# Altium PCB POVBase.PcbDoc (part 1 of 3)
Units mm, origin at the board's own origin, x right, y up, seen from the top; angles counter-clockwise.
Board outline 80 x 80 mm, 2 copper layers (Top Layer, Bottom Layer); 110 components, 82 nets, 474 pads, 224 vias.
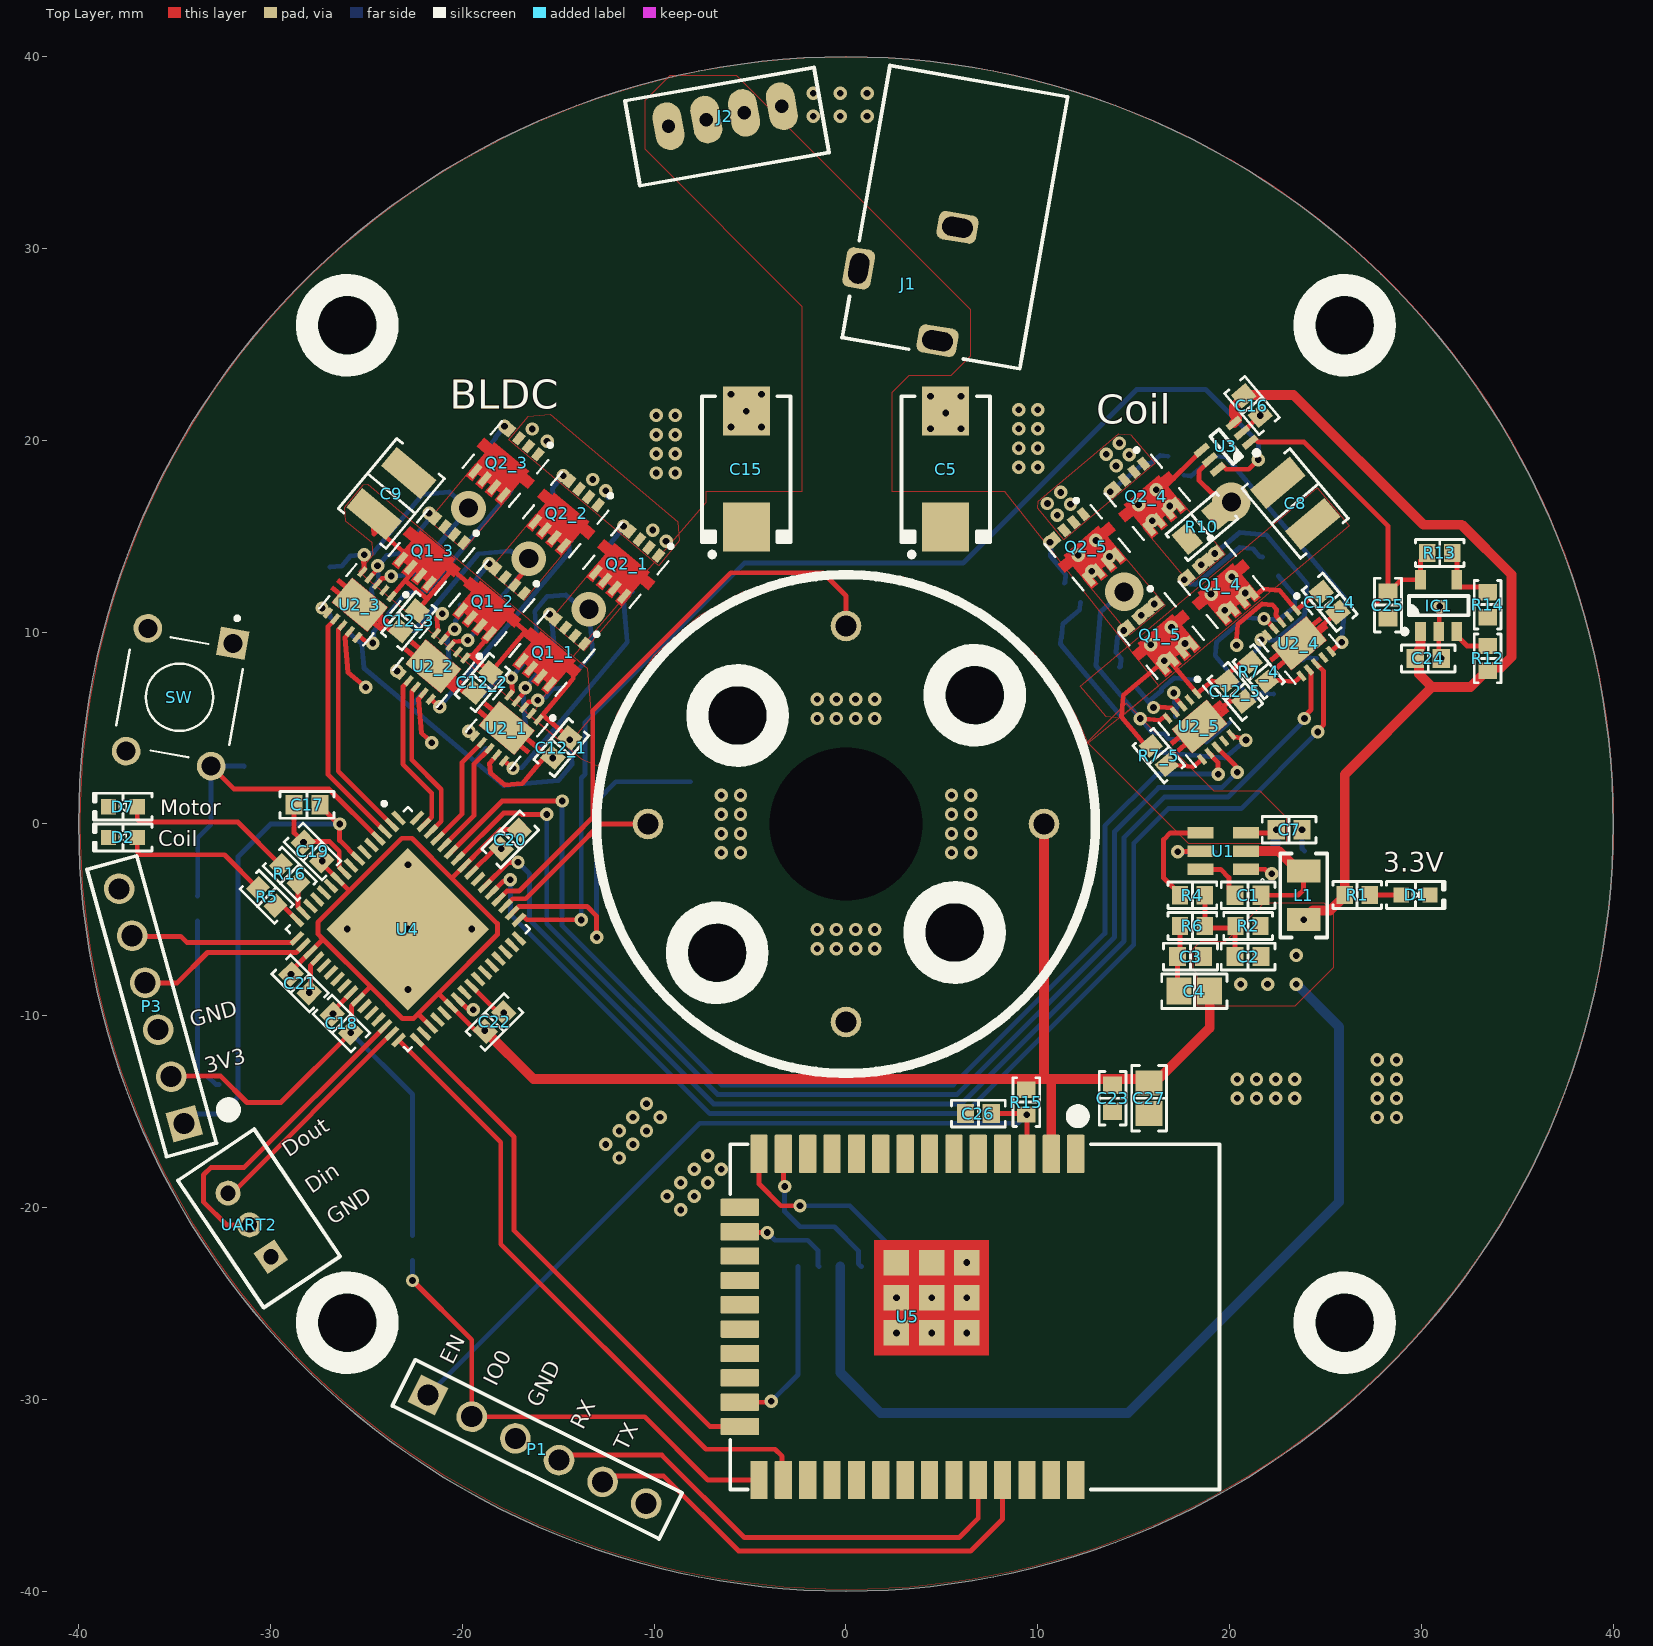
[diagram p0: Top Layer view]
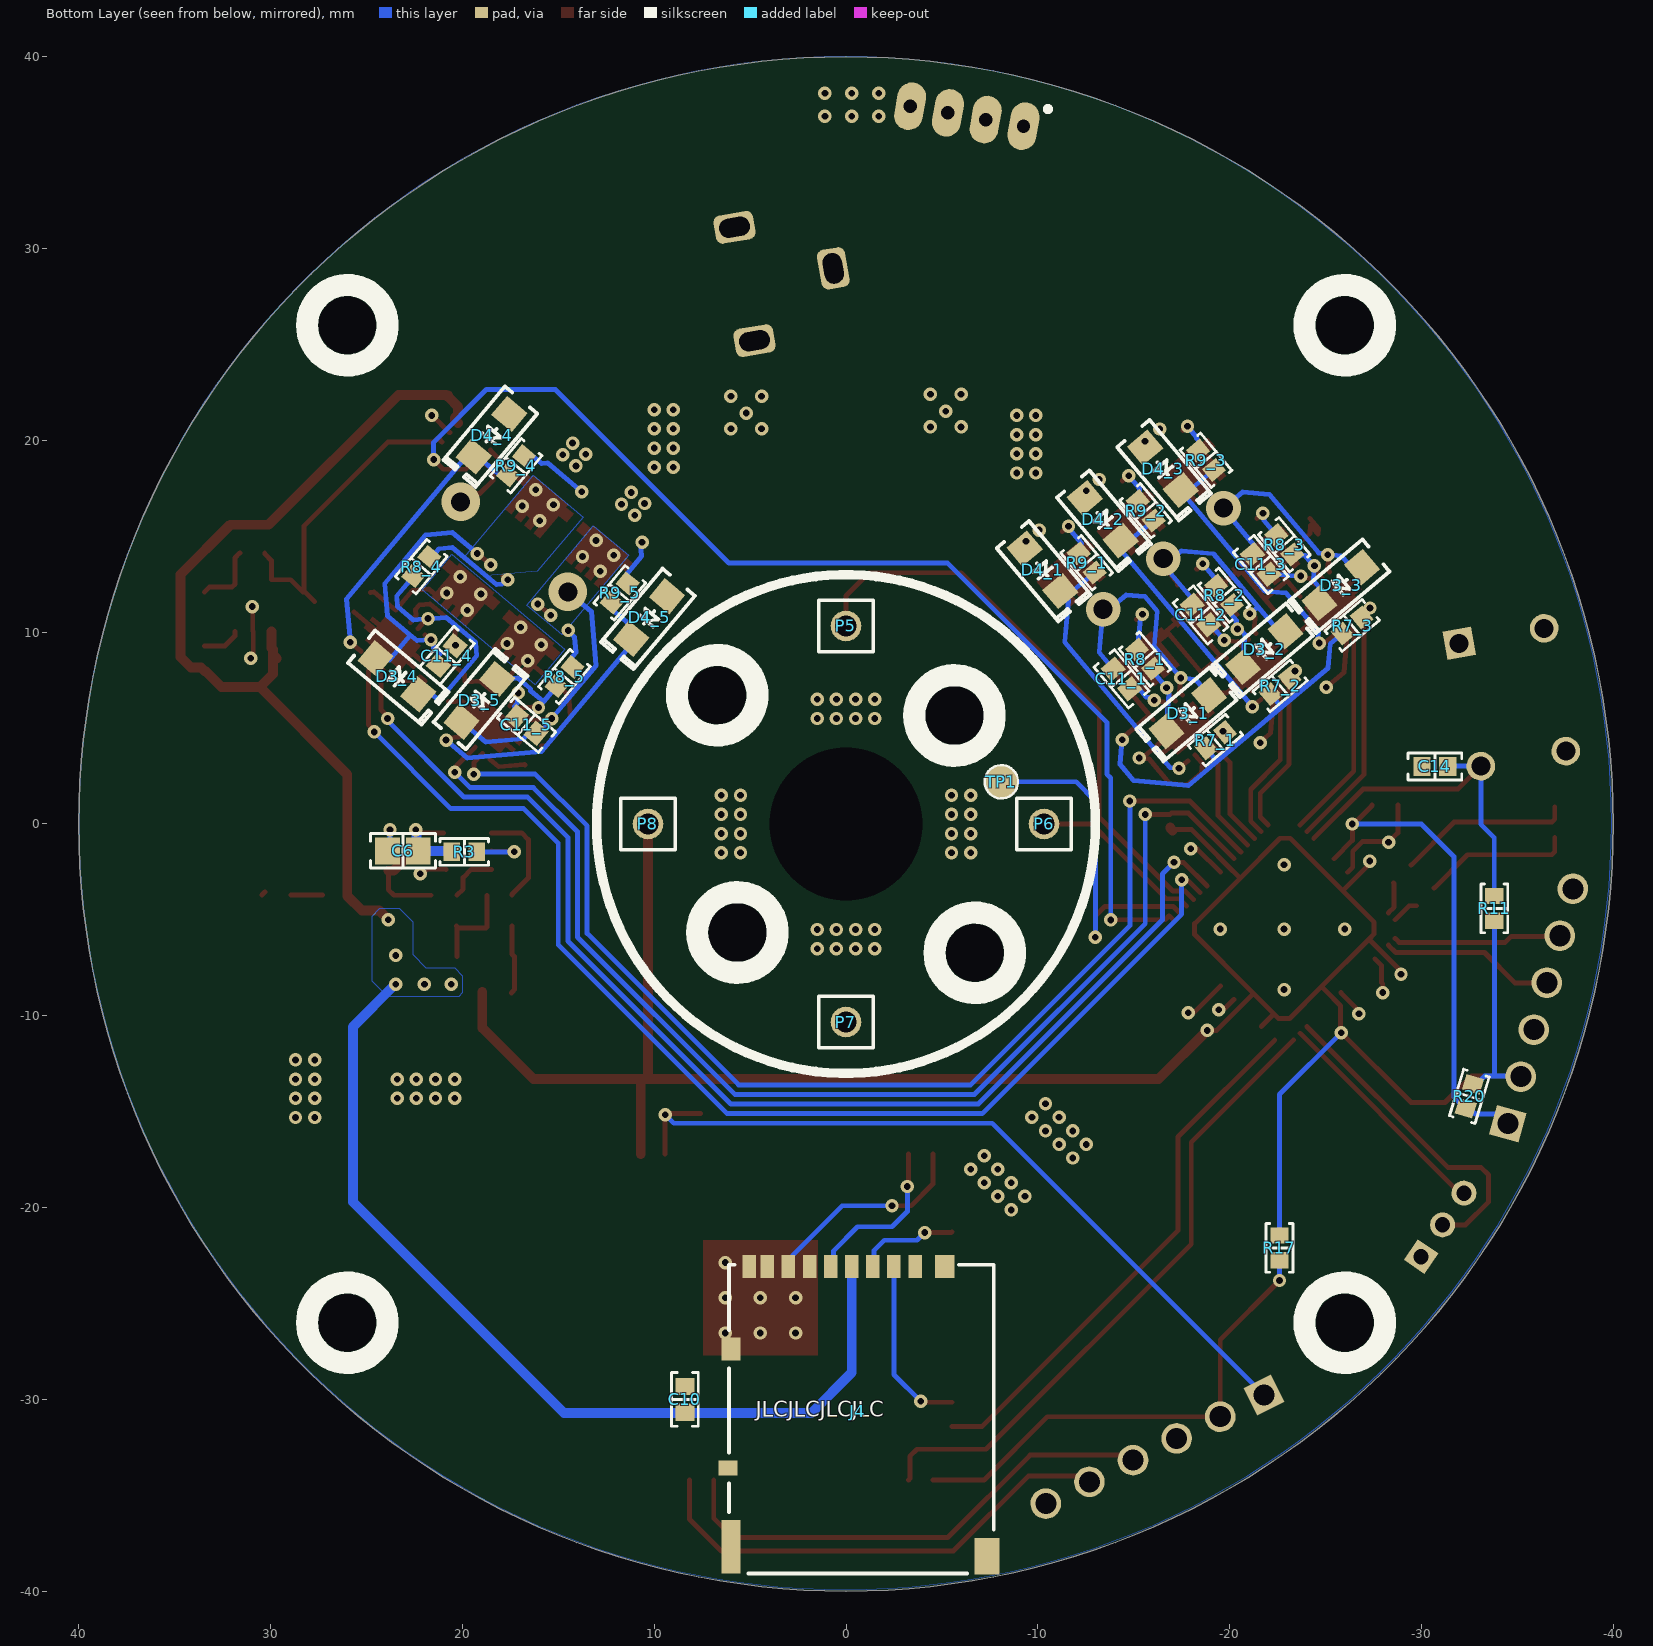
[diagram p1: Bottom Layer view, seen from below]
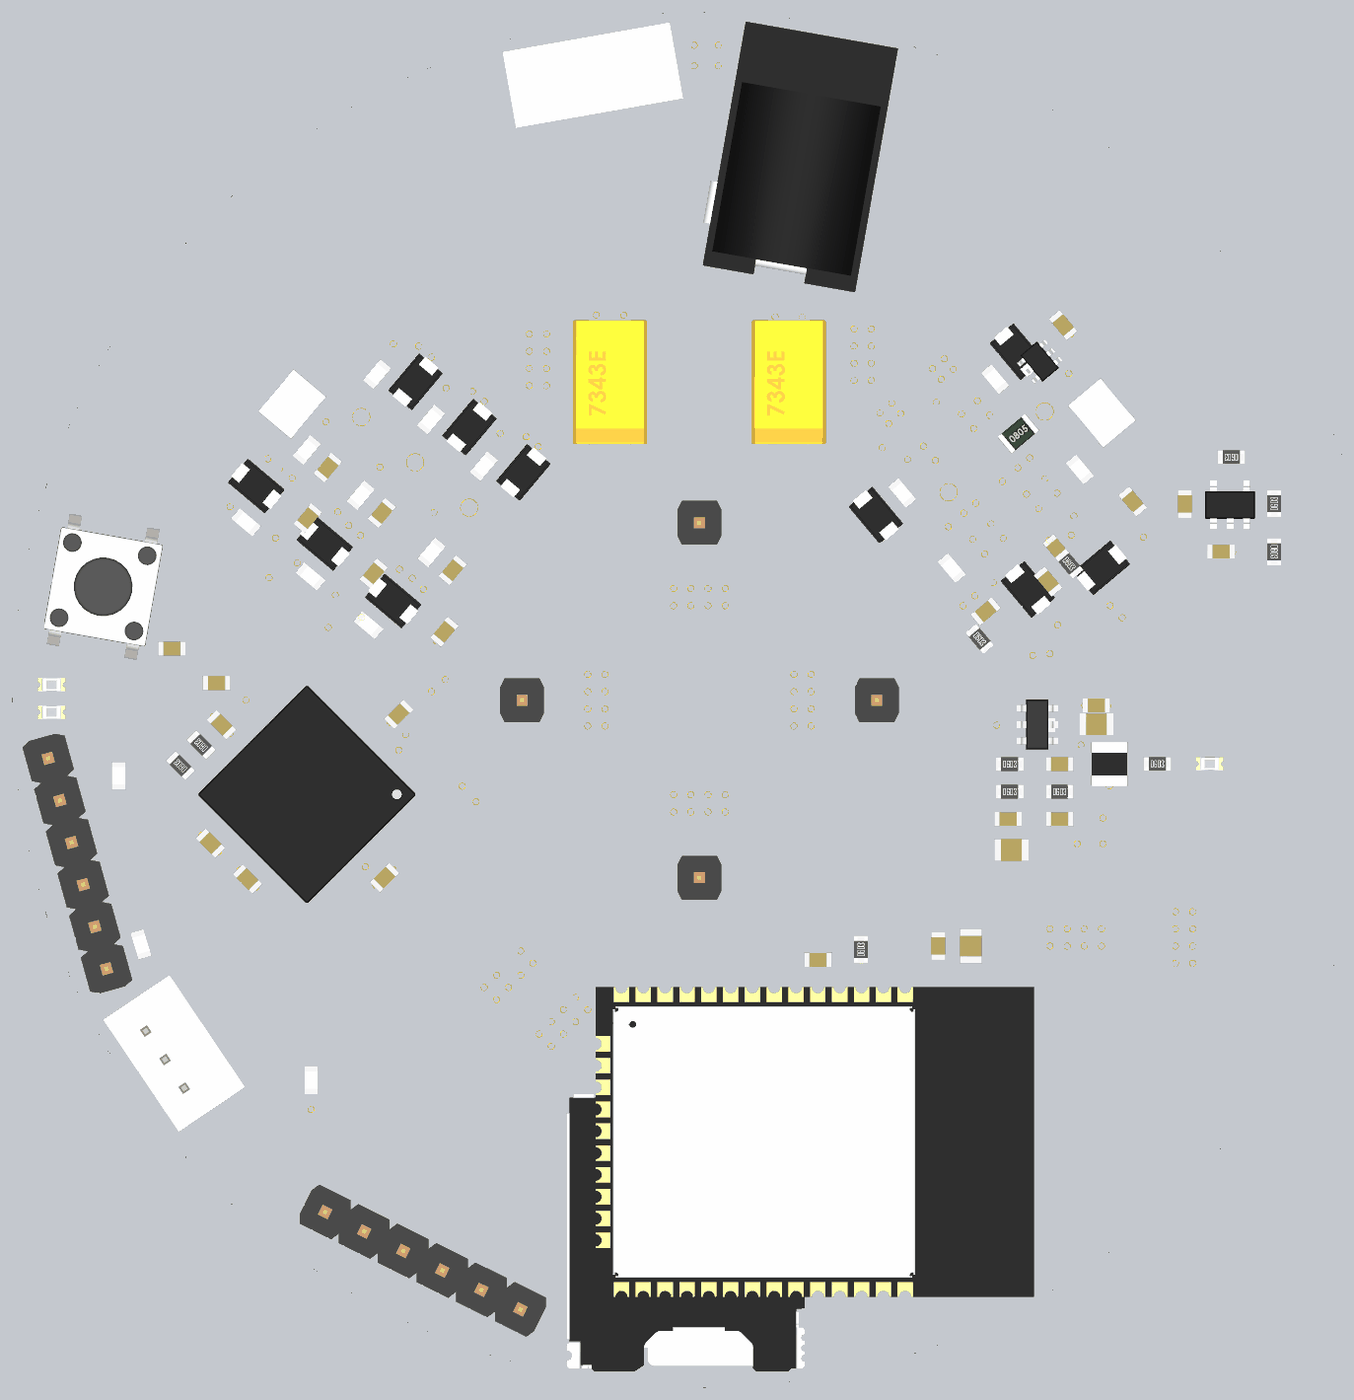
[diagram p3: 3D render of the assembled board from above, using the file's embedded part models]
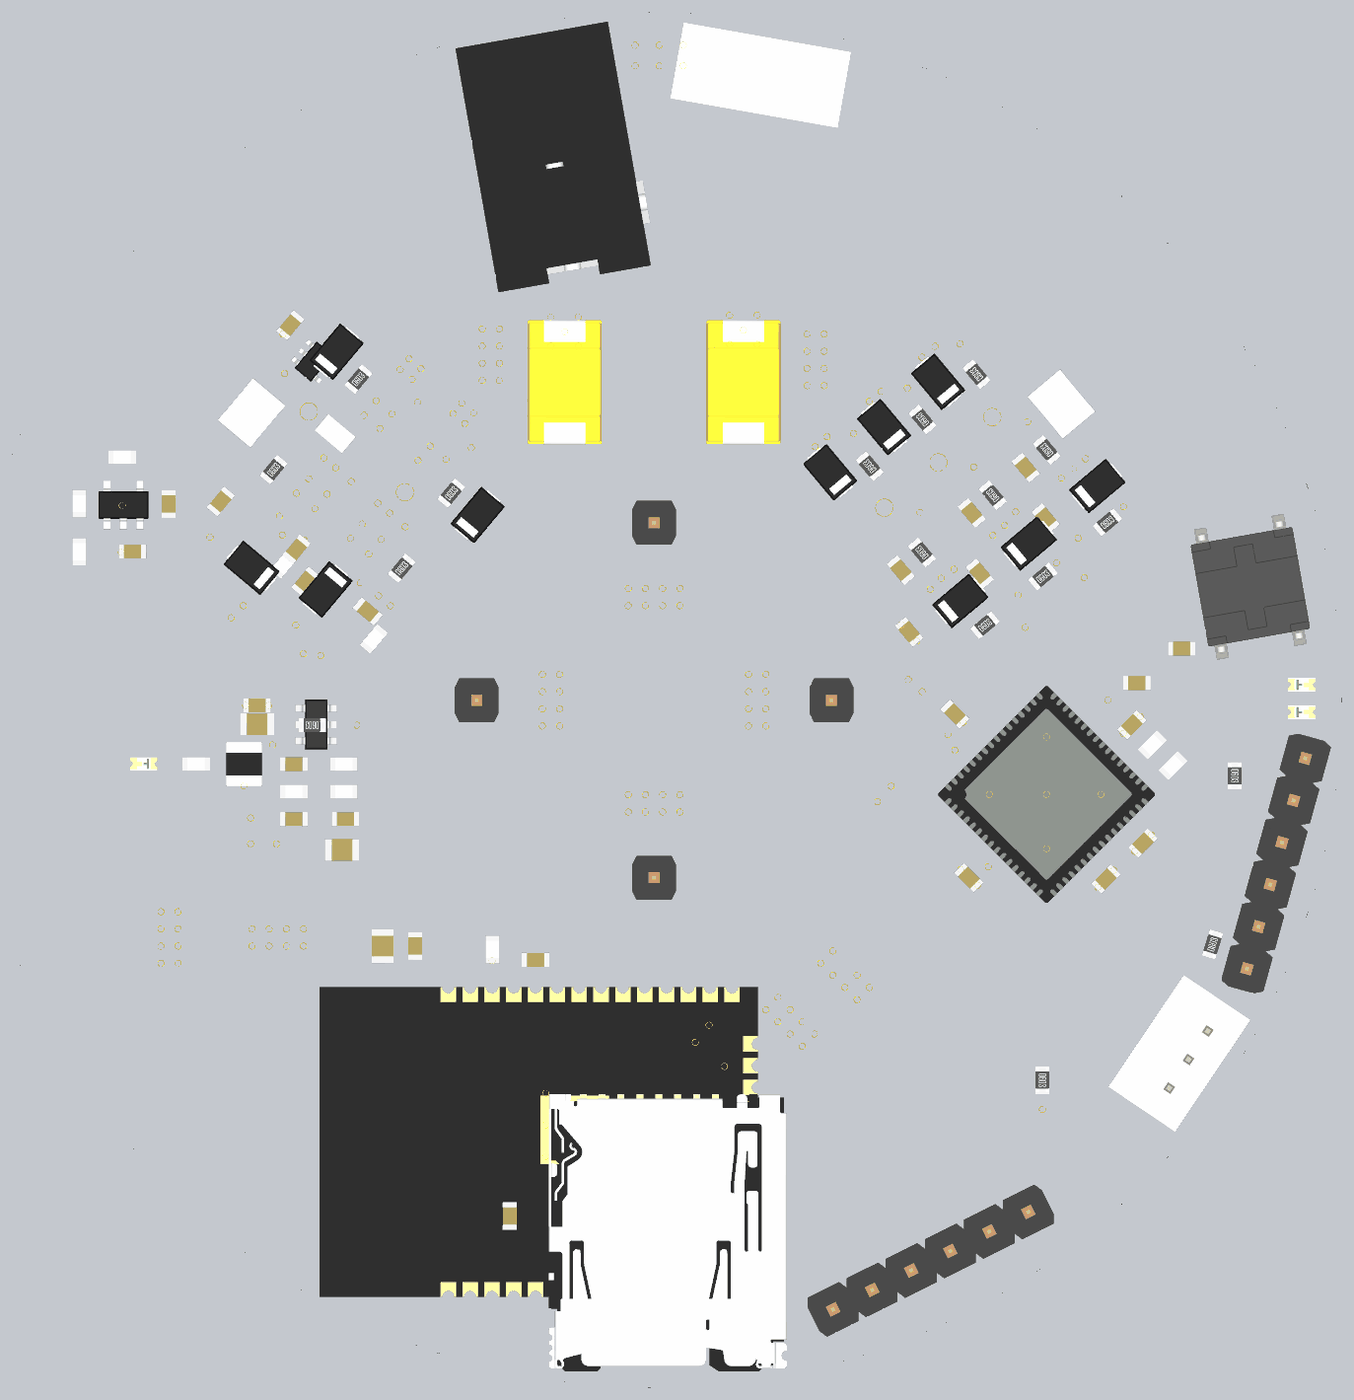
[diagram p4: 3D render of the assembled board from below, using the file's embedded part models]

## Layer stack, top to bottom
Top Solder: solder mask 0.0102, Solder Resist, Dk 3.5
Top Layer: signal copper 0.0356
Dielectric 1: dielectric 0.32, FR-4, Dk 4.8
Bottom Layer: signal copper 0.0356
Bottom Solder: solder mask 0.0102, Solder Resist, Dk 3.5

## Board outline
0,-40 cw(c0,0) -40,0 cw(c0,0) 0,40 cw(c0,0) 40,0 cw(c0,0)

## Design rules (kind name [scope] priority, off if disabled: settings)
BoardOutlineClearance [All] p1: gap=0.512 ignorepadtopadclearanceinfootprint=FALSE
Clearance [All] p1: gap=0.1 ignorepadtopadclearanceinfootprint=TRUE except(0: Arc-Hole Track-Hole SMDPad-Hole THPad-Hole Via-Hole Fill-Hole Poly-Hole Region-Hole Text-Hole)
PolygonConnect [IsPolygon and not IsNamedPolygon('PolygonDirect')] p1: thpad.connectstyle=Relief thpad.reliefconductorwidth=0.254 thpad.reliefentries=4 thpad.polygonreliefangle="90 Angle" thpad.airgapwidth=0.254 smdpad.connectstyle=Relief smdpad.reliefconductorwidth=0.254 smdpad.reliefentries=4 smdpad.polygonreliefangle="90 Angle" smdpad.airgapwidth=0.254 via.connectstyle=Direct via.reliefconductorwidth=0.254 via.reliefentries=4 via.polygonreliefangle="90 Angle" via.airgapwidth=0.254
PolygonConnect PolygonDirect [(IsNamedPolygon('PolygonDirect'))] p2: connectstyle=Direct reliefconductorwidth=0.254 reliefentries=4 polygonreliefangle="90 Angle" airgapwidth=0.254
RoutingVias [All] p1: holewidth=0.35 width=0.7 viastyle="Through Hole" minholewidth=0.1 minwidth=0.5 maxholewidth=2 maxwidth=2.5
SilkToSilkClearance [All] p1: silktosilkclearance=0.1
SolderMaskExpansion [All] p1: expansion=0.102 istentingtop=FALSE
Width [All] p1: maxlimit=2 minlimit=0.128 preferedwidth=0.254
29 further rules are at their usual default settings.

## Classes and differential pairs
component class U_ESP32: C23 C26 C27 P1 R15 R17 U5
channel class "Half Bridge": U_BLDC1 U_BLDC2 U_BLDC3 U_COIL1 U_COIL2
net class COIL_OUT[2..1]: COIL_OUT1 COIL_OUT2
net class COIL_LOW[1..2]: COIL_LOW1 COIL_LOW2
net class COIL_HI[1..2]: COIL_HI1 COIL_HI2
net class BLDC_OUT[3..1]: BLDC_OUT1 BLDC_OUT2 BLDC_OUT3
net class BLDC_LOW[1..3]: BLDC_LOW1 BLDC_LOW2 BLDC_LOW3
net class BLDC_HI[1..3]: BLDC_HI1 BLDC_HI2 BLDC_HI3
component class U_PIC32MK: C14 C17 C18 C19 C20 C21 C22 D2 D7 P3 P5 P6 P7 P8 R5 R11 R16 R20 SW TP1 U4 UART2

## Components (designator, comment, footprint, x,y, rotation, side; value= is the part's Value field where it differs from the comment)
C1 "1µF" "CAP 0603_1608" 20.961,-3.715 r180 top
C2 "47pF" "CAP 0603_1608" 20.961,-6.915 r0 top
C3 "1µF" "CAP 0603_1608" 17.961,-6.915 r0 top
C4 "22µF" "CAP 0805_2012" 18.161,-8.715 r0 top
C5 "220µF" "CAP POL 2917_7343" 5.2,18.5 r90 top
C6 "22µF" "CAP 0805_2012" 23.1,-1.4 r180 bottom
C7 "0.1µF" "CAP 0603_1608" 23.1,-0.3 r0 top
C8 "100µF" "CAP 1210_3225 - 2.8MM" 23.421,16.714 r310 top
C9 "100µF" "CAP 1210_3225 - 2.8MM" -23.7,17.228 r230 top
C10 "0.1µF" "CAP 0603_1608" 8.4,-30 r90 bottom
C11_1 "0.1µF" "CAP 0603_1608" -14.36,7.567 r230 bottom (schematic designator C11)
C11_2 "0.1µF" "CAP 0603_1608" -18.484,10.897 r230 bottom (schematic designator C11)
C11_3 "0.1µF" "CAP 0603_1608" -21.625,13.533 r230 bottom (schematic designator C11)
C11_4 "0.1µF" "CAP 0603_1608" 20.811,8.78 r130 bottom (schematic designator C11)
C11_5 "0.1µF" "CAP 0603_1608" 16.662,5.168 r40 bottom (schematic designator C11)
C12_1 "1µF" "CAP 0603_1608" -14.84,3.983 r50 top (schematic designator C12)
C12_2 "1µF" "CAP 0603_1608" -18.957,7.378 r50 top (schematic designator C12)
C12_3 "1µF" "CAP 0603_1608" -22.787,10.592 r50 top (schematic designator C12)
C12_4 "1µF" "CAP 0603_1608" 25.215,11.562 r130 top (schematic designator C12)
C12_5 "1µF" "CAP 0603_1608" 20.292,6.909 r130 top (schematic designator C12)
C14 "0.1µF" "CAP 0603_1608" -30.7,3 r0 bottom
C15 "220µF" "CAP POL 2917_7343" -5.2,18.5 r90 top
C16 "0.1µF" "CAP 0603_1608" 21.166,21.817 r310 top
C17 "0.1µF" "CAP 0603_1608" -28.1,1 r180 top
C18 "0.1µF" "CAP 0603_1608" -26.3,-10.4 r135 top
C19 "0.1µF" "CAP 0603_1608" -27.809,-1.432 r135 top
C20 "0.1µF" "CAP 0603_1608" -17.502,-0.809 r225 top
C21 "0.1µF" "CAP 0603_1608" -28.458,-8.313 r315 top
C22 "0.1µF" "CAP 0603_1608" -18.321,-10.32 r45 top
C23 "0.1µF" "CAP 0603_1608" 13.9,-14.3 r270 top
C24 "0.1µF" "CAP 0603_1608" 30.353,8.634 r0 top
C25 "2.2µF" "CAP 0603_1608" 28.253,11.409 r90 top
C26 "0.1µF" "CAP 0603_1608" 6.9,-15.1 r180 top
C27 "22µF" "CAP 0805_2012" 15.8,-14.3 r90 top
D1 "Green" "LED 0603_1608 GREEN" 29.7,-3.7 r0 top
D2 "Blue" "LED 0603_1608 GREEN" -37.7,-0.7 r180 top value=Green
D3_1 "V1F6-M3/H" "SMF DO-219AB" -17.823,5.773 r320 bottom (schematic designator D3)
D3_2 "V1F6-M3/H" "SMF DO-219AB" -21.806,9.116 r320 bottom (schematic designator D3)
D3_3 "V1F6-M3/H" "SMF DO-219AB" -25.79,12.458 r320 bottom (schematic designator D3)
D3_4 "V1F6-M3/H" "SMF DO-219AB" 23.414,7.7 r220 bottom (schematic designator D3)
D3_5 "V1F6-M3/H" "SMF DO-219AB" 19.116,6.444 r130 bottom (schematic designator D3)
D4_1 "V1F6-M3/H" "SMF DO-219AB" -10.243,13.251 r230 bottom (schematic designator D4)
D4_2 "V1F6-M3/H" "SMF DO-219AB" -13.384,15.886 r230 bottom (schematic designator D4)
D4_3 "V1F6-M3/H" "SMF DO-219AB" -16.525,18.522 r230 bottom (schematic designator D4)
D4_4 "V1F6-M3/H" "SMF DO-219AB" 18.48,20.27 r310 bottom (schematic designator D4)
D4_5 "V1F6-M3/H" "SMF DO-219AB" 10.266,10.767 r310 bottom (schematic designator D4)
D7 "Blue" "LED 0603_1608 GREEN" -37.7,0.9 r180 top value=Green
IC1 "MIC5377YC5" "TI SOT-23-5 DBV" 30.903,11.384 r90 top
J1 "PJ-102AH" "CUI PJ-102AH" 5.9,31.6 r350 top
J2 "B4B-PH-K-S(LF)(SN)" "JST B4B-PH-K" -6.3,36.9 r10 top
J4 "DM3AT-SF-PEJM5" "HIROSE DM3AT-SF-PEJM5" -0.4,-30.9 r180 bottom
L1 "4.7µH" "IND 1008_2520" 23.861,-3.715 r270 top
P1 "61300611121" 61300611121 -16.1,-32.6 r333.5 top
P3 "61300611121" 61300611121 -36.2,-9.5 r105.5 top
P5 "61300111121" 61300111121 0,10.324 r0 bottom
P6 "61300111121" 61300111121 -10.324,0 r0 bottom
P7 "61300111121" 61300111121 0,-10.324 r0 bottom
P8 "61300111121" 61300111121 10.324,0 r0 bottom
Q1_1 "NVTFS5C680NL" NVTFS015N04CTAG -15.328,8.902 r230 top (schematic designator Q1)
Q1_2 "NVTFS5C680NL" NVTFS015N04CTAG -18.469,11.537 r230 top (schematic designator Q1)
Q1_3 "NVTFS5C680NL" NVTFS015N04CTAG -21.61,14.173 r230 top (schematic designator Q1)
Q1_4 "NVTFS5C680NL" NVTFS015N04CTAG 19.569,12.437 r310 top (schematic designator Q1)
Q1_5 "NVTFS5C680NL" NVTFS015N04CTAG 16.428,9.802 r310 top (schematic designator Q1)
Q2_1 "NVTFS5C680NL" NVTFS015N04CTAG -11.472,13.498 r230 top (schematic designator Q2)
Q2_2 "NVTFS5C680NL" NVTFS015N04CTAG -14.612,16.134 r230 top (schematic designator Q2)
Q2_3 "NVTFS5C680NL" NVTFS015N04CTAG -17.753,18.769 r230 top (schematic designator Q2)
Q2_4 "NVTFS5C680NL" NVTFS015N04CTAG 15.712,17.034 r310 top (schematic designator Q2)
Q2_5 "NVTFS5C680NL" NVTFS015N04CTAG 12.572,14.398 r310 top (schematic designator Q2)
R1 "1 kOhms" "RES 0603_1608" 26.65,-3.7 r0 top
R2 "40.2 k" "RES 0603_1608" 20.961,-5.315 r0 top
R3 "10 kOhms" "RES 0603_1608" 19.899,-1.452 r0 bottom
R4 "75 kOhms" "RES 0603_1608" 18.061,-3.715 r0 top
R5 "1 kOhms" "RES 0603_1608" -30.2,-3.8 r135 top
R6 "13 kOhms" "RES 0603_1608" 18.061,-5.315 r0 top
R7_1 "10 kOhms" "RES 0603_1608" -19.262,4.37 r140 bottom (schematic designator R7)
R7_2 "10 kOhms" "RES 0603_1608" -22.632,7.198 r140 bottom (schematic designator R7)
R7_3 "10 kOhms" "RES 0603_1608" -26.386,10.348 r140 bottom (schematic designator R7)
R7_4 "10 kOhms" "RES 0603_1608" 21.518,7.937 r310 top (schematic designator R7)
R7_5 "10 kOhms" "RES 0603_1608" 16.309,3.566 r310 top (schematic designator R7)
R8_1 "2.55 Ohms" "RES 0603_1608" -15.585,8.595 r50 bottom (schematic designator R8)
R8_2 "2.55 Ohms" "RES 0603_1608" -19.71,11.926 r50 bottom (schematic designator R8)
R8_3 "2.55 Ohms" "RES 0603_1608" -22.851,14.561 r50 bottom (schematic designator R8)
R8_4 "2.55 Ohms" "RES 0603_1608" 22.139,13.419 r130 bottom (schematic designator R8)
R8_5 "2.55 Ohms" "RES 0603_1608" 14.681,7.683 r130 bottom (schematic designator R8)
R9_1 "2.55 Ohms" "RES 0603_1608" -12.547,13.617 r50 bottom (schematic designator R9)
R9_2 "2.55 Ohms" "RES 0603_1608" -15.623,16.329 r50 bottom (schematic designator R9)
R9_3 "2.55 Ohms" "RES 0603_1608" -18.764,18.964 r50 bottom (schematic designator R9)
R9_4 "2.55 Ohms" "RES 0603_1608" 17.205,18.678 r130 bottom (schematic designator R9)
R9_5 "2.55 Ohms" "RES 0603_1608" 11.799,12.052 r130 bottom (schematic designator R9)
R10 "3 mOhms" "STACKPOLE CSR0805" 18.56,15.507 r40 top
R11 "10 kOhms" "RES 0603_1608" -33.8,-4.4 r270 bottom
R12 "10 kOhms" "RES 0603_1608" 33.453,8.634 r270 top
R13 "6.49 kOhms" "RES 0603_1608" 30.953,14.134 r180 top
R14 "10 kOhms" "RES 0603_1608" 33.453,11.434 r90 top
R15 "10 kOhms" "RES 0603_1608" 9.4,-14.5 r90 top
R16 "1 kOhms" "RES 0603_1608" -29,-2.6 r135 top
R17 "10 kOhms" "RES 0603_1608" -22.6,-22.1 r270 bottom
R20 "10 kOhms" "RES 0603_1608" -32.5,-14.2 r107 bottom
SW "Push Button" PushButton -31.968,9.419 r260 top
TP1 "TP" TP -8.1,2.2 r180 bottom
U1 "AP65211A" TSOT-26-6 19.661,-1.415 r180 top
U2_1 "UCC27282" VSON-10 -17.687,5.004 r230 top (schematic designator U2)
U2_2 "UCC27282" VSON-10 -21.515,8.219 r230 top (schematic designator U2)
U2_3 "UCC27282" VSON-10 -25.348,11.432 r230 top (schematic designator U2)
U2_4 "UCC27282" VSON-10 23.609,9.431 r310 top (schematic designator U2)
U2_5 "UCC27282" VSON-10 18.429,5.084 r310 top (schematic designator U2)
U3 "INA210" "TI SC70-6 DCK" 19.8,19.7 r220 top
U4 "PIC32MK0512MCF064" QFN50P900X900X100-65N -22.84,-5.477 r315 top
U5 "ESP32" "Espressif ESP32-WROOM-32" 4.465,-25.7 r270 top
UART2 "3 pin 2mm JST Male" "3pin - 2mm header" -31.1,-20.9 r124 top

## Footprints (in the part's own frame and the unit in brackets; to place one, negate y for a bottom-side part, rotate by r counter-clockwise, add the part's x,y. Pads: shape width x height; smd on the part's side, far side on the other; paste and mask are expansions set on the pad)
"3pin - 2mm header" [mm]
  rect 1.3x1.3 hole 0.8: 1(-2,0)
  round 1.3 hole 0.8: 2(0,0) 3(2,0)
  silkscreen extent -4,-3 4,1.8, body extent -3.93,-2.97 3.93,1.7, height 5.89
61300111121 [mm] "Pin Header, pitch 2.54 mm, THT, Vertical, single row, 1p"
  round 1.6 hole 1.1: 1(0,0)
  silkscreen extent -1.42,-1.34 1.42,1.35, body extent -1.27,-1.27 1.27,1.27, height 8.57
61300611121 [mm] "Pin Header, pitch 2.54 mm, THT, Vertical, single row, 6p"
  rect 1.6x1.6 hole 1.1: 1(-6.35,0)
  round 1.6 hole 1.1: 2(-3.81,0) 3(-1.27,0) 4(1.27,0) 5(3.81,0) 6(6.35,0)
  silkscreen extent -7.77,-1.35 7.77,1.35, body extent -7.62,-1.27 7.62,1.27, height 8.57
"CAP 0603_1608" [mm] "Chip Capacitor, 2-Leads, Body 1.60x0.80mm, IPC Medium Density"
  rect 0.9x1 smd: 1(-0.675,0) 2(0.675,0)
  silkscreen extent -1.4,-0.7 1.4,0.7, body extent -0.8,-0.41 0.8,0.41, height 0.82
"CAP 0805_2012" [mm] "Chip Capacitor, 2-Leads, Body 2.00x1.20mm, IPC Medium Density"
  rect 1.3x1.4 smd: 1(-0.8,0) 2(0.8,0)
  silkscreen extent -1.7,-0.9 1.7,0.9, body extent -1,-0.64 1,0.64, height 1.26
"CAP 1210_3225 - 2.8MM" [mm] "Chip Capacitor, 2-Leads, Body 3.20x2.50mm, IPC Medium Density"
  rect 1.3x2.7 smd: 1(-1.4,0) 2(1.4,0)
  silkscreen extent -2.37,-1.63 2.37,1.63, body extent -1.6,-1.25 1.6,1.25, height 2.8
"CAP POL 2917_7343" [mm] "Molded Capacitor, 2-Leads, Body 7.30x4.30mm, IPC Medium Density"
  rect 2.55x2.45 smd: 1(-3.025,0) 2(3.025,0)
  silkscreen extent -4.57,-2.3 3.8,2.3, body extent -3.65,-2.15 3.65,2.15, height 4.1
"CUI PJ-102AH" [mm] "DC Barrel Jack W/ Switch 2.0x5.5"
  rrect50% 2.1x1.5 hole 1 slot 1.6 at 0 deg: 1(0,-6.5) 2(0,-0.5)
  rrect50% 1.5x2.1 hole 1 slot 1.6 at 90 deg: 3(-4.7,-3.5)
  silkscreen extent -4.93,-7.2 4.48,7.2, body extent -4.92,-7.2 4.47,7.2, height 11
"Espressif ESP32-WROOM-32" [mm] "39-SMD Module"
  rrect10% 2x0.9 smd paste+0 mask+0.05: 1(-8.5,7.51) 2(-8.5,6.24) 3(-8.5,4.97) 4(-8.5,3.7) 5(-8.5,2.43) 6(-8.5,1.16) 7(-8.5,-0.11) 8(-8.5,-1.38) 9(-8.5,-2.65) 10(-8.5,-3.92) 11(-8.5,-5.19) 12(-8.5,-6.46) 13(-8.5,-7.73) 14(-8.5,-9) 25(8.5,-9) 26(8.5,-7.73) 27(8.5,-6.46) 28(8.5,-5.19) 29(8.5,-3.92) 30(8.5,-2.65)
  rrect10% 0.9x2 smd paste+0 mask+0.05: 15(-5.715,-10) 16(-4.445,-10) 17(-3.175,-10) 18(-1.905,-10) 19(-0.635,-10) 20(0.635,-10) 21(1.905,-10) 22(3.175,-10) 23(4.445,-10) 24(5.715,-10)
  rect 2x0.9 smd paste+0 mask+0.05: 31(8.5,-1.38) 32(8.5,-0.11) 33(8.5,1.16) 34(8.5,2.43) 35(8.5,3.7) 36(8.5,4.97) 37(8.5,6.24) 38(8.5,7.51)
  rect 1.33x1.33 smd paste+0 mask+0.05: 39(-2.835,1.835) 39(-2.835,0) 39(-2.835,-1.835) 39(-1,1.835) 39(-1,0) 39(-1,-1.835) 39(0.835,1.835) 39(0.835,0) 39(0.835,-1.835)
  Top Layer region: -4.001,-2.999 1.999,-2.999 1.999,3.001 -4.001,3.001
  silkscreen extent -10.71,-10.5 9,15, body extent -9,-10.5 9,15, height 3.2
"HIROSE DM3AT-SF-PEJM5" [mm]
  rect 0.7x1.2 smd: 1(3.2,7.825) 2(2.1,7.825) 3(1,7.825) 4(-0.1,7.825) 5(-1.2,7.825) 6(-2.3,7.825) 7(-3.4,7.825) 8(-4.5,7.825) 9(-5.45,7.825)
  rect 1x0.8 smd: 10(-6.55,-2.675)
  rect 1x2.8 smd: S(-6.4,-6.775)
  rect 1x1.2 smd: S(-6.4,3.525) S(4.75,7.825)
  rect 1.3x1.9 smd: S(6.95,-7.275)
  silkscreen extent -6.5,-8.18 7.3,7.93, body extent -6.53,-8.17 7.32,7.98, height 1.68
"IND 1008_2520" [mm] "Chip Inductance, 2-leads, Body 2.5x2.1mm, IPC Medium Density"
  rect 1.2x1.75 smd: 1(-1.275,0) 2(1.275,0)
  silkscreen extent -2.18,-1.22 2.2,1.22, body extent -1.3,-1.05 1.3,1.05, height 1
"JST B4B-PH-K" [mm]
  oval 1.5x2.5 hole 0.7: 1(-3,0) 2(-1,0) 3(1,0) 4(3,0)
  silkscreen extent -5,-2.8 5,1.7, body extent -4.95,-2.8 4.95,1.7, height 6
"LED 0603_1608 GREEN" [mm] "Chip Diode, 2-Leads, Body 1.60x0.80mm, IPC Medium Density"
  rect 0.8x0.8 smd: 1(-0.75,0) 2(0.75,0)
  silkscreen extent -1.52,-0.7 1.52,0.7, body extent -0.8,-0.4 0.8,0.4, height 0.53
NVTFS015N04CTAG [mm]
  rect 0.66x0.42 smd: 1(-1.47,0.975) 2(-1.47,0.325) 3(-1.47,-0.325) 4(-1.47,-0.975)
  rect 0.8x0.34 smd: 5(1.3,-0.975) 6(1.3,-0.325) 7(1.3,0.325) 8(1.3,0.975)
  Top Layer region: -0.5,-1.185 -0.5,1.185 -0.32,1.185 -0.32,1.73 0.25,1.73 0.25,1.185 1.8,1.185 1.8,0.765 1.33,0.765 1.33,0.535 1.8,0.535 1.8,0.115 1.33,0.115 1.33,-0.115 1.8,-0.115 1.8,-0.535 1.33,-0.535 1.33,-0.765 1.8,-0.765 1.8,-1.185 0.25,-1.185 0.25,-1.73 -0.32,-1.73 -0.32,-1.185
  silkscreen extent -2.35,-1.58 1.58,1.58, body extent -1.7,-1.7 1.7,1.7, height 1.1
PushButton [mm] "Through hole PushButton"
  rect 1.498x1.498 hole 0.99: 1(0,0)
  round 1.498 hole 0.99: 2(6.5,0) 3(0,-4.5) 4(6.5,-4.5)
  silkscreen extent -1.42,-5.25 6.24,0.75, body extent -0.6,-5.2 7.1,0.8, height 4.95
QFN50P900X900X100-65N [mm]
  rect 0.86x0.26 smd: 1(-4.435,3.75) 2(-4.435,3.25) 3(-4.435,2.75) 4(-4.435,2.25) 5(-4.435,1.75) 6(-4.435,1.25) 7(-4.435,0.75) 8(-4.435,0.25) 9(-4.435,-0.25) 10(-4.435,-0.75) 11(-4.435,-1.25) 12(-4.435,-1.75) 13(-4.435,-2.25) 14(-4.435,-2.75) 15(-4.435,-3.25) 16(-4.435,-3.75) 33(4.435,-3.75) 34(4.435,-3.25) 35(4.435,-2.75) 36(4.435,-2.25) 37(4.435,-1.75) 38(4.435,-1.25) 39(4.435,-0.75) 40(4.435,-0.25) 41(4.435,0.25) 42(4.435,0.75) 43(4.435,1.25) 44(4.435,1.75) 45(4.435,2.25) 46(4.435,2.75) 47(4.435,3.25) 48(4.435,3.75)
  rect 0.26x0.86 smd: 17(-3.75,-4.435) 18(-3.25,-4.435) 19(-2.75,-4.435) 20(-2.25,-4.435) 21(-1.75,-4.435) 22(-1.25,-4.435) 23(-0.75,-4.435) 24(-0.25,-4.435) 25(0.25,-4.435) 26(0.75,-4.435) 27(1.25,-4.435) 28(1.75,-4.435) 29(2.25,-4.435) 30(2.75,-4.435) 31(3.25,-4.435) 32(3.75,-4.435) 49(3.75,4.435) 50(3.25,4.435) 51(2.75,4.435) 52(2.25,4.435) 53(1.75,4.435) 54(1.25,4.435) 55(0.75,4.435) 56(0.25,4.435) 57(-0.25,4.435) 58(-0.75,4.435) 59(-1.25,4.435) 60(-1.75,4.435) 61(-2.25,4.435) 62(-2.75,4.435) 63(-3.25,4.435) 64(-3.75,4.435)
  rect 6x6 smd: 65(0,0)
  silkscreen extent -5.59,-4.5 4.5,4.5, body extent -4.52,-4.52 4.52,4.52, height 0.9
"RES 0603_1608" [mm] "Chip Resistor, 2-Leads, Body 1.60x0.80mm, IPC Medium Density"
  rect 0.85x0.95 smd: 1(-0.65,0) 2(0.65,0)
  silkscreen extent -1.27,-0.7 1.27,0.7, body extent -0.8,-0.4 0.8,0.4, height 0.45
"SMF DO-219AB" [mm] "Molded Diode, 2-Leads, Body 3.90x1.90mm, IPC Medium Density"
  rect 1.3x1.4 smd: 1(-1.45,0) 2(1.45,0)
  silkscreen extent -2.4,-1.1 2.59,1.1, body extent -1.5,-0.9 1.5,0.9, height 1.18
"STACKPOLE CSR0805" [mm] "Chip Resistor, 2-Leads, Body 2.00x1.25mm, IPC Medium Density"
  rect 1x1.35 smd: 1(-1,0) 2(1,0)
  silkscreen extent -1.7,-0.9 1.7,0.9, body extent -1.05,-0.63 1.05,0.62, height 0.55
"TI SC70-6 DCK" [mm] "SC70, 6-Leads, Body 2.00x2.10mm, Pitch 0.65mm, IPC Medium Density"
  rect 0.85x0.35 smd: 1(-1.1,0.65) 2(-1.1,0) 3(-1.1,-0.65) 4(1.1,-0.65) 5(1.1,0) 6(1.1,0.65)
  silkscreen extent -1.12,-0.9 0.3,1.42, body extent -1.06,-1 1.06,1, height 1.1
"TI SOT-23-5 DBV" [mm] "SOT23, 5-Leads, Body 2.90x2.80mm, Pitch 0.95mm, IPC Medium Density"
  rect 1x0.55 smd: 1(-1.35,0.95) 2(-1.35,0) 3(-1.35,-0.95) 4(1.35,-0.95) 5(1.35,0.95)
  silkscreen extent -1.47,-1.55 0.5,1.9, body extent -1.44,-1.43 1.39,1.48, height 1.5
TP [mm]
  round 1.75 smd: 1(0,0)
  silkscreen extent -0.87,-0.87 0.87,0.87
TSOT-26-6 [mm]
  rect 1.35x0.6 smd: 1(-1.185,0.95) 2(-1.185,0) 3(-1.185,-0.95) 4(1.185,-0.95) 5(1.185,0) 6(1.185,0.95)
  silkscreen extent -2.15,1.45 -1.95,1.65, body extent -1.2,-1.45 1.2,1.45, height 1
VSON-10 [mm]
  rrect25% 0.6x0.24 smd mask+0: 1(-1.4,1) 2(-1.4,0.5) 3(-1.4,0) 4(-1.4,-0.5) 5(-1.4,-1) 6(1.4,-1) 7(1.4,-0.5) 8(1.4,0) 9(1.4,0.5) 10(1.4,1)
  rrect5% 1.65x2.4 smd paste-2 mask+0: 11(0,0)
  Top Layer region: 0.375,1.2 0.825,1.2 0.825,-1.2 0.375,-1.2 0.375,-1.7 0.125,-1.7 0.125,-1.2 -0.125,-1.2 -0.125,-1.7 -0.375,-1.7 -0.375,-1.2 -0.825,-1.2 -0.825,1.2 -0.375,1.2 -0.375,1.7 -0.125,1.7 -0.125,1.2 0.125,1.2 0.125,1.7 0.375,1.7
  silkscreen extent -2.04,-1.5 1.5,1.6, body extent -1.5,-1.5 1.5,1.5, height 1

## Part data
C1 C3: library part GCJ188R71E105KA01D, "CAP CER 1UF 25V X7R 0603", Device Package="0603 (1608 Metric)", Manufacturer="Murata Electronics", Operating Temperature="-55°C ~ 125°C", Ratings=AEC-Q200, Supplier Part Number 1=490-14409-1-ND, Temperature Coefficient=X7R, Tolerance=±10%, Applications="Automotive, Boardflex Sensitive", Capacitance=1µF, ComponentLink1Description=Datasheet, ComponentLink1URL=https://search.murata.co.jp/Ceramy/image/img/A01X/G101/ENG/GCJ188R71E105KA01-01.pdf, ComponentLink2Description="DigiKey Link", ComponentLink2URL=http://digikey.com/product-detail/en/murata-electronics/GCJ188R71E105KA01D/490-14409-1-ND/6606870, Features="Soft Termination", LastUpdated="13-Aug-20 10:24:06 AM", Lifecycle Status=Active, Minimum Order=1, Mounting Type="Surface Mount, MLCC", Package / Case="0603 (1608 Metric)", Packaging=TapeAndReel, Part Number=GCJ188R71E105KA01D, Part Status=Active, PartId=9566, Price=0.05, Series=GCJ, Size / Dimension="0.063\" L x 0.031\" W (1.60mm x 0.80mm)", Supplier 1=DigiKey, Thickness (Max)="0.035\" (0.90mm)"
C2: library part C1608NP02A470J080AA, "CAP CER 47PF 100V NP0 0603", Device Package="0603 (1608 Metric)", Manufacturer="TDK Corporation", Operating Temperature="-55°C ~ 150°C", Supplier Part Number 1=445-14125-1-ND, Temperature Coefficient="C0G, NP0", Tolerance=±5%, Applications="General Purpose", Capacitance=47pF, ComponentLink1Description=Datasheet, ComponentLink1URL=https://product.tdk.com/info/en/catalog/datasheets/mlcc_commercial_hightemp_en.pdf?ref_disty=digikey, ComponentLink2Description="DigiKey Link", ComponentLink2URL=http://digikey.com/product-detail/en/tdk-corporation/C1608NP02A470J080AA/445-14125-1-ND/3955791, Features="High Temperature", LastUpdated="13-Aug-20 10:25:18 AM", Lifecycle Status=Active, Minimum Order=1, Mounting Type="Surface Mount, MLCC", Package / Case="0603 (1608 Metric)", Packaging=TapeAndReel, Part Number=C1608NP02A470J080AA, Part Status=Active, PartId=7049, Price=0.04, Series=C, Size / Dimension="0.063\" L x 0.031\" W (1.60mm x 0.80mm)", Supplier 1=DigiKey, Thickness (Max)="0.035\" (0.90mm)"
C4 C27: library part CL21A226MOQNNNE, "CAP CER 22UF 16V X5R 0805", Device Package="0805 (2012 Metric)", Manufacturer="Samsung Electro-Mechanics", Operating Temperature="-55°C ~ 85°C", Supplier Part Number 1=1276-2909-1-ND, Temperature Coefficient=X5R, Tolerance=±20%, Voltage - Rated=16V, Applications="General Purpose", Capacitance=22µF, ComponentLink1Description=Datasheet, ComponentLink1URL=http://www.samsungsem.com/kr/support/product-search/mlcc/CL21A226MOQNNNE.jsp, ComponentLink2Description="DigiKey Link", ComponentLink2URL=http://digikey.com/product-detail/en/samsung-electro-mechanics/CL21A226MOQNNNE/1276-2909-1-ND/3890995, LastUpdated="21-Jan-20 12:03:05 AM", Lifecycle Status=Active, Minimum Order=1, Mounting Type="Surface Mount, MLCC", Package / Case="0805 (2012 Metric)", Packaging=TapeAndReel, Part Number=CL21A226MOQNNNE, Part Status=Active, PartId=3052, Price=0.11, Series=CL, Size / Dimension="0.079\" L x 0.049\" W (2.00mm x 1.25mm)", Supplier 1=DigiKey, Thickness (Max)="0.055\" (1.40mm)"
C5 C15: library part T510X227K016ATE040, "CAP TANT 220UF 10% 16V 2917", Device Package="2917 (7343 Metric)", ESR (Equivalent Series Resistance)=40mOhm, Lifetime @ Temp.="2000 Hrs @ 85°C", Manufacturer=KEMET, Manufacturer Size Code=X, Operating Temperature="-55°C ~ 125°C", Supplier Part Number 1=399-4805-1-ND, Tolerance=±10%, Voltage - Rated=16V, Capacitance=220µF, ComponentLink1Description=Datasheet, ComponentLink1URL=https://api.kemet.com/component-edge/download/datasheet/T510X227K016ATE040.pdf, ComponentLink2Description="DigiKey Link", ComponentLink2URL=http://digikey.com/product-detail/en/kemet/T510X227K016ATE040/399-4805-1-ND/1085524, Features="General Purpose", Height - Seated (Max)="0.169\" (4.30mm)", LastUpdated="30-Aug-20 8:55:47 PM", Lifecycle Status=Active, Minimum Order=1, Mounting Type="Surface Mount", Package / Case="2917 (7343 Metric)", Packaging=TapeAndReel, Part Number=T510X227K016ATE040, Part Status=Active, PartId=1966, Price=4.46, Series=T510, Size / Dimension="0.287\" L x 0.169\" W (7.30mm x 4.30mm)", Supplier 1=DigiKey, Type=Molded
C6: library part C2012X7S1E106K125AC, "CAP CER 10UF 25V X7S 0805", Capacitance=10µF, Device Package="0805 (2012 Metric)", Manufacturer="TDK Corporation", Operating Temperature="-55°C ~ 125°C", Supplier Part Number 1=445-181600-1-ND, Temperature Coefficient=X7S, Tolerance=±10%, Voltage - Rated=25V, Applications="General Purpose", ComponentLink1Description=Datasheet, ComponentLink1URL=https://product.tdk.com/en/search/capacitor/ceramic/mlcc/info?part_no=C2012X7S1E106K125AC?ref_disty=digikey, ComponentLink2Description="DigiKey Link", ComponentLink2URL=http://digikey.com/product-detail/en/tdk-corporation/C2012X7S1E106K125AC/445-181600-1-ND/9991478, Features="Low ESL", LastUpdated="21-Jan-20 12:03:04 AM", Lifecycle Status=Active, Minimum Order=1, Mounting Type="Surface Mount, MLCC", Package / Case="0805 (2012 Metric)", Packaging=TapeAndReel, Part Number=C2012X7S1E106K125AC, Part Status=Active, PartId=3339, Price=0.15, Series=C, Size / Dimension="0.079\" L x 0.049\" W (2.00mm x 1.25mm)", Supplier 1=DigiKey, Thickness (Max)="0.057\" (1.45mm)"
C7 C10 C11_1 C11_2 C11_3 C11_4 C11_5 C14 C16 C17 C18 C19 C20 C21 C22 C23 C24 C26: library part GCG188R92A104KA03D, "CAP CER 0.1UF 100V 0603 EPOXY", Device Package="0603 (1608 Metric)", Manufacturer="Murata Electronics", Operating Temperature="-55°C ~ 150°C", Ratings=AEC-Q200, Supplier Part Number 1=490-18197-1-ND, Temperature Coefficient=X8R, Tolerance=±10%, Voltage - Rated=100V, Applications=Automotive, Capacitance=0.1µF, ComponentLink1Description=Datasheet, ComponentLink1URL=https://search.murata.co.jp/Ceramy/image/img/A01X/G101/ENG/GCG188R92A104KA03-01.pdf, ComponentLink2Description="DigiKey Link", ComponentLink2URL=http://digikey.com/product-detail/en/murata-electronics/GCG188R92A104KA03D/490-18197-1-ND/9867926, Features="Epoxy Mountable", LastUpdated="21-Jan-20 12:01:59 AM", Lifecycle Status=Active, Minimum Order=1, Mounting Type="Surface Mount, MLCC, Epoxy", Package / Case="0603 (1608 Metric)", Packaging=TapeAndReel, Part Number=GCG188R92A104KA03D, Part Status=Active, PartId=9025, Price=0.07, Series=GCG, Size / Dimension="0.063\" L x 0.031\" W (1.60mm x 0.80mm)", Supplier 1=DigiKey, Thickness (Max)="0.035\" (0.90mm)"
C8 C9: library part EMK325ABJ107MM-P, "CAP CER 100UF 16V X5R 1210", Device Package="1210 (3225 Metric)", Manufacturer="Taiyo Yuden", Operating Temperature="-55°C ~ 85°C", Supplier Part Number 1=587-5426-1-ND, Temperature Coefficient=X5R, Tolerance=±20%, Voltage - Rated=16V, Applications="General Purpose", Capacitance=100µF, ComponentLink1Description=Datasheet, ComponentLink1URL="https://ds.yuden.co.jp/TYCOMPAS/ut/detail?pn=EMK325ABJ107MM-P &u=M", ComponentLink2Description="DigiKey Link", ComponentLink2URL=http://digikey.com/product-detail/en/taiyo-yuden/EMK325ABJ107MM-P/587-5426-1-ND/7067102, LastUpdated="21-Jan-20 12:30:21 AM", Lifecycle Status=Active, Minimum Order=1, Mounting Type="Surface Mount, MLCC", Package / Case="1210 (3225 Metric)", Packaging=TapeAndReel, Part Number=EMK325ABJ107MM-P, Part Status=Active, PartId=24141, Price=0.71, Series=M, Size / Dimension="0.126\" L x 0.098\" W (3.20mm x 2.50mm)", Supplier 1=DigiKey, Thickness (Max)="0.110\" (2.80mm)"
C12_1 C12_2 C12_3 C12_4 C12_5: library part GCJ188R71E105KA01D, "CAP CER 1UF 25V X7R 0603", Device Package="0603 (1608 Metric)", Manufacturer="Murata Electronics", Operating Temperature="-55°C ~ 125°C", Ratings=AEC-Q200, Supplier Part Number 1=490-14409-1-ND, Temperature Coefficient=X7R, Tolerance=±10%, Voltage - Rated=25V, Applications="Automotive, Boardflex Sensitive", Capacitance=1µF, ComponentLink1Description=Datasheet, ComponentLink1URL=https://search.murata.co.jp/Ceramy/image/img/A01X/G101/ENG/GCJ188R71E105KA01-01.pdf, ComponentLink2Description="DigiKey Link", ComponentLink2URL=http://digikey.com/product-detail/en/murata-electronics/GCJ188R71E105KA01D/490-14409-1-ND/6606870, Features="Soft Termination", LastUpdated="21-Jan-20 12:01:58 AM", Lifecycle Status=Active, Minimum Order=1, Mounting Type="Surface Mount, MLCC", Package / Case="0603 (1608 Metric)", Packaging=TapeAndReel, Part Number=GCJ188R71E105KA01D, Part Status=Active, PartId=9566, Price=0.05, Series=GCJ, Size / Dimension="0.063\" L x 0.031\" W (1.60mm x 0.80mm)", Supplier 1=DigiKey, Thickness (Max)="0.035\" (0.90mm)"
C25: library part CC0603ZRY5V5BB225, "CAP CER 2.2UF 6.3V Y5V 0603", Device Package="0603 (1608 Metric)", Manufacturer=Yageo, Operating Temperature="-30°C ~ 85°C", Supplier Part Number 1=311-1452-1-ND, Temperature Coefficient="Y5V (F)", Tolerance="-20%, +80%", Voltage - Rated=6.3V, Applications="General Purpose", Capacitance=2.2µF, ComponentLink1Description=Datasheet, ComponentLink1URL=http://www.yageo.com/documents/recent/UPY-GPHC_Y5V_6.3V-to-50V_8.pdf, ComponentLink2Description="DigiKey Link", ComponentLink2URL=http://digikey.com/product-detail/en/yageo/CC0603ZRY5V5BB225/311-1452-1-ND/2833758, LastUpdated="21-Jan-20 12:02:09 AM", Lifecycle Status=Active, Minimum Order=1, Mounting Type="Surface Mount, MLCC", Package / Case="0603 (1608 Metric)", Packaging=TapeAndReel, Part Number=CC0603ZRY5V5BB225, Part Status=Active, PartId=2250, Price=0.02, Series=CC, Size / Dimension="0.063\" L x 0.031\" W (1.60mm x 0.80mm)", Supplier 1=DigiKey, Thickness (Max)="0.035\" (0.90mm)"
D1: library part XZCDGK53W-8VF, "1.6X0.8MM LC GREEN PIXSOLED DOME", Current - Test=2mA, Device Package="0603 (1608 Metric)", Lens Color=Colorless, Manufacturer=SunLED, Millicandela Rating=417mcd, Supplier Device Package=2-SMD, Supplier Part Number 1=1497-XZCDGK53W-8VFCT-ND, Voltage - Forward (Vf) (Typ)=2.65V, Color=Green, ComponentLink1Description=Datasheet, ComponentLink1URL=https://www.sunledusa.com/products/spec/XZCDGK53W-8VF.pdf, ComponentLink2Description="DigiKey Link", ComponentLink2URL=http://digikey.com/product-detail/en/sunled/XZCDGK53W-8VF/1497-XZCDGK53W-8VFCT-ND/10449792, Configuration=Independent, Height (Max)=1.10mm, LastUpdated="21-Jan-20 3:12:09 AM", Lens Size="0.35mm Dia", Lens Style="Round with Domed Top", Lens Transparency=Clear, Lifecycle Status=Active, Minimum Order=1, Mounting Type="Surface Mount", Package / Case="0603 (1608 Metric)", Packaging=Unknown, Part Number=XZCDGK53W-8VF, Part Status=Active, PartId=938, Price=0.18, Series="Ultra Low Current", Size / Dimension="1.60mm L x 0.80mm W", Supplier 1=DigiKey, Viewing Angle=60°, Wavelength - Dominant=525nm, Wavelength - Peak=515nm
D2 D7: library part XZCDGK53W-8VF, "Blue LED", Color=Green, Current - Test=2mA, Device Package="0603 (1608 Metric)", Lens Color=Colorless, Manufacturer=SunLED, Millicandela Rating=417mcd, Supplier Device Package=2-SMD, Supplier Part Number 1=1497-XZCDGK53W-8VFCT-ND, Voltage - Forward (Vf) (Typ)=2.65V, ComponentLink1Description=Datasheet, ComponentLink1URL=https://www.sunledusa.com/products/spec/XZCDGK53W-8VF.pdf, ComponentLink2Description="DigiKey Link", ComponentLink2URL=http://digikey.com/product-detail/en/sunled/XZCDGK53W-8VF/1497-XZCDGK53W-8VFCT-ND/10449792, Configuration=Independent, Height (Max)=1.10mm, LastUpdated="21-Jan-20 3:12:09 AM", Lens Size="0.35mm Dia", Lens Style="Round with Domed Top", Lens Transparency=Clear, Lifecycle Status=Active, Minimum Order=1, Mounting Type="Surface Mount", Package / Case="0603 (1608 Metric)", Packaging=Unknown, Part Number=XZCDGK53W-8VF, Part Status=Active, PartId=938, Price=0.18, Series="Ultra Low Current", Size / Dimension="1.60mm L x 0.80mm W", Supplier 1=DigiKey, Viewing Angle=60°, Wavelength - Dominant=525nm, Wavelength - Peak=515nm
D3_1 D3_2 D3_3 D3_4 D3_5 D4_1 D4_2 D4_3 D4_4 D4_5: "1A 60V SMF TRENCH SKY RECT", Capacitance @ Vr, F="135pF @ 4V, 1MHz", Current - Average Rectified (Io)=1A, Current - Reverse Leakage @ Vr="270µA @ 60V", Manufacturer="Vishay Semiconductor Diodes Division", Operating Temperature - Junction="-40°C ~ 150°C", Package / Case=DO-219AB, Supplier Device Package="DO-219AB (SMF)", Supplier Part Number 1=112-V1F6-M3/HCT-ND, Voltage - DC Reverse (Vr) (Max)=60V, Voltage - Forward (Vf) (Max) @ If="600mV @ 1A", ComponentLink1Description=Datasheet, ComponentLink1URL=http://www.vishay.com/docs/87555/v1f6.pdf, ComponentLink2Description="DigiKey Link", ComponentLink2URL=http://digikey.com/product-detail/en/vishay-semiconductor-diodes-division/V1F6-M3-H/112-V1F6-M3-HCT-ND/10660586, Diode Type=Schottky, LastUpdated="02-Sep-20 1:23:13 AM", Lifecycle Status=Active, Minimum Order=1, Mounting Type="Surface Mount", Packaging=Unknown, Part Number=V1F6-M3/H, Part Status=Active, PartId=3272, Price=0.07, Series="eSMP®, TMBS®", Speed="Fast Recovery =< 500ns, > 200mA (Io)", Supplier 1=DigiKey
IC1: "IC REG LIN POS ADJ 150MA SOT23-5", Current - Output=150mA, Current - Quiescent (Iq)=100µA, Current - Supply (Max)=140µA, Device Package="SC-74A, SOT-753", Manufacturer="Texas Instruments", Operating Temperature="-40°C ~ 125°C", Supplier Device Package=SOT-23-5, Supplier Part Number 1=296-11014-1-ND, Voltage - Input (Max)=10V, Voltage - Output (Max)=6.5V, Voltage - Output (Min/Fixed)=1.5V, ComponentLink1Description=Datasheet, ComponentLink1URL=http://www.ti.com/general/docs/suppproductinfo.tsp?distId=10&gotoUrl=http%3A%2F%2Fwww.ti.com%2Flit%2Fgpn%2Ftps763, ComponentLink2Description="DigiKey Link", ComponentLink2URL=http://digikey.com/product-detail/en/texas-instruments/TPS76301DBVR/296-11014-1-ND/477331, Control Features=Enable, LastUpdated="18-Jan-20 8:02:45 PM", Lifecycle Status=Active, Minimum Order=1, Mounting Type="Surface Mount", Number of Regulators=1, Output Configuration=Positive, Output Type=Adjustable, Package / Case="SC-74A, SOT-753", Packaging=TapeAndReel, Part Number=MIC5377YC5, Part Status=Active, Price=0.33, Protection Features="Over Current, Over Temperature, Reverse Polarity", PSRR="60dB (1kHz)", Series=-, Supplier 1=DigiKey
J1: "CONN PWR JACK 2X5.5MM SOLDER", Current Rating (Amps)=5A, Manufacturer="CUI Devices", Material Flammability Rating="UL94 V-0", Supplier Part Number 1=CP-102AH-ND, Voltage - Rated=24VDC, Actual Diameter="0.079\" (2.00mm ID), 0.256\" (6.50mm OD)", ComponentLink1Description=Datasheet, ComponentLink1URL=https://www.cuidevices.com/product/resource/digikeypdf/pj-102ah.pdf, ComponentLink2Description="DigiKey Link", ComponentLink2URL=//digikey.com/product-detail/en/cui-devices/PJ-102AH/CP-102AH-ND/408448, Connector Type=Jack, Gender=Male, Industry Recognized Mating Diameter="2.00mm ID (0.079\"), 5.50mm OD (0.217\")", Internal Switch(s)="Single Switch, Normally Closed", LastUpdated="12/16/2019 7:01:27 PM", Lifecycle Status=0, Mating Length/Depth="0.354\" (9.00mm)", Minimum Order=1, Mounting Type="Through Hole, Right Angle", Number of Positions/Contacts="2 Conductors, 3 Contacts", Packaging=Tray, Part Number=PJ-102AH, Part Status=Active, Price=0.76, Series=-, Shielding=Unshielded, Supplier 1=DigiKey, Termination=Solder
J2: "CONN HEADER VERT 4POS 2MM", Current Rating (Amps)=2A, Insulation Color=Natural, Manufacturer="JST Sales America Inc.", Material Flammability Rating="UL94 V-0", Operating Temperature="-25°C ~ 85°C", Supplier Part Number 1=455-1706-ND, Voltage Rating=100V, ComponentLink1Description=Datasheet, ComponentLink1URL=http://www.jst-mfg.com/product/pdf/eng/ePH.pdf, ComponentLink2Description="DigiKey Link", ComponentLink2URL=http://digikey.com/product-detail/en/jst-sales-america-inc/B4B-PH-K-S-LF-SN/455-1706-ND/926613, Connector Type=Header, Contact Finish - Mating=Tin, Contact Finish - Post=Tin, Contact Length - Mating="0.130\" (3.30mm)", Contact Length - Post="0.134\" (3.40mm)", Contact Material=Brass, Contact Shape=Square, Contact Type="Male Pin", Fastening Type="Detent Lock", Insulation Height="0.236\" (6.00mm)", Insulation Material="Polyamide (PA66), Nylon 6/6", LastUpdated="1/12/2020 10:29:40 PM", Lifecycle Status=Active, Minimum Order=1, Mounting Type="Through Hole", Number of Positions=4, Number of Positions Loaded=All, Number of Rows=1, Overall Contact Length="0.333\" (8.45mm)", Packaging=Bulk, Part Number=B4B-PH-K-S(LF)(SN), Part Status=Active, PartId=27, Pitch - Mating="0.079\" (2.00mm)", Price=0.24, Series=PH, Shrouding="Shrouded - 4 Wall", Style="Board to Cable/Wire", Supplier 1=DigiKey, Termination="Press-Fit, Solder"
J4: "CONN MICRO SD CARD PUSH-PUSH R/A", Manufacturer="Hirose Electric Co Ltd", Supplier Part Number 1=HR1964TR-ND, Card Type="Secure Digital - microSD™", ComponentLink1Description=Datasheet, ComponentLink1URL=https://www.hirose.com/product/document?clcode=CL0609-0033-6-00&productname=DM3AT-SF-PEJ2M5&series=DM3&documenttype=Catalog&lang=en&documentid=D49662_en, ComponentLink2Description="DigiKey Link", ComponentLink2URL=//digikey.com/product-detail/en/hirose-electric-co-ltd/DM3AT-SF-PEJM5/HR1964TR-ND/2533565, Connector Type="Connector and Ejector", Contact Finish=Gold, Features=Switch, Height Above Board="0.066\" (1.68mm)", Insertion, Removal Method="Push In, Push Out", LastUpdated="12/16/2019 8:34:40 PM", Lifecycle Status=0, Minimum Order=1, Mounting Feature="Normal, Standard - Top", Mounting Type="Surface Mount, Right Angle", Number of Positions="10 (8 + 2)", Packaging=TapeAndReel, Part Number=DM3AT-SF-PEJM5, Part Status=Active, Price=1.41, Series=DM3, Supplier 1=DigiKey
L1: library part MLP2520S4R7ST0S1, "FIXED IND 4.7UH 1A 110 MOHM SMD", Current Rating (Amps)=1A, DC Resistance (DCR)="143mOhm Max", Device Package="1008 (2520 Metric)", Inductance Frequency - Test=2MHz, Manufacturer="TDK Corporation", Operating Temperature="-40°C ~ 125°C", Supplier Part Number 1=445-6378-1-ND, Tolerance=±20%, ComponentLink1Description=Datasheet, ComponentLink1URL=https://product.tdk.com/info/en/catalog/datasheets/inductor_commercial_power_mlp2520_en.pdf?ref_disty=digikey, ComponentLink2Description="DigiKey Link", ComponentLink2URL=http://digikey.com/product-detail/en/tdk-corporation/MLP2520S4R7ST0S1/445-6378-1-ND/2465705, Height - Seated (Max)="0.039\" (1.00mm)", Inductance=4.7µH, LastUpdated="13-Aug-20 11:03:40 AM", Lifecycle Status=Active, Material - Core=Ferrite, Minimum Order=1, Mounting Type="Surface Mount", Package / Case="1008 (2520 Metric)", Packaging=TapeAndReel, Part Number=MLP2520S4R7ST0S1, Part Status=Active, PartId=3467, Price=0.14, Series=MLP, Shielding=Shielded, Size / Dimension="0.098\" L x 0.079\" W (2.50mm x 2.00mm)", Supplier 1=DigiKey, Supplier Device Package="1008 (2520 Metric)", Type=Multilayer
P1 P3: "WR-PHD Pin Header, THT, pitch 2.54mm, Single Row, Vertical, 6p", Contact Resistance=20mOhm, Manufacturer="Wurth Elektronik", Operating Temperature="-40 to +105degC", Rated Current=3A, Withstanding Voltage=500VAC, Working Voltage=250VAC, ComponentLink1Description=Manufacturer, ComponentLink1URL=http://www.we-online.de, ComponentLink2Description=Datasheet, ComponentLink2URL=https://www.we-online.com/catalog/datasheet/61300611121.pdf, Gender="Pin Header", Manufacturer Part Number=61300611121, Mounting Technology=THT, Orientation=Vertical, Packaging=Bag, Pin Number=6, Pitch=2.54mm, Published Date="May 2020", Row Number=Single
P5 P6 P7 P8: "WR-PHD Pin Header, THT, pitch 2.54mm, Single Row, Vertical, 1p", Contact Resistance=20mOhm, Manufacturer="Wurth Elektronik", Operating Temperature="-40 to +105degC", Rated Current=3A, Withstanding Voltage=500VAC, Working Voltage=250VAC, ComponentLink1Description=Manufacturer, ComponentLink1URL=http://www.we-online.de, ComponentLink2Description=Datasheet, ComponentLink2URL=https://www.we-online.com/catalog/datasheet/61300111121.pdf, Gender="Pin Header", Manufacturer Part Number=61300111121, Mounting Technology=THT, Orientation=Vertical, Packaging=Bag, Pin Number=1, Pitch=2.54mm, Published Date="May 2020", Row Number=Single
Q1_1 Q1_2 Q1_3 Q1_4 Q1_5 Q2_1 Q2_2 Q2_3 Q2_4 Q2_5: "N-FET"
R1 R5 R16: library part RNCF0603DTE1K00, "RES 1K OHM 0.5% 1/10W 0603", Device Package="0603 (1608 Metric)", Manufacturer="Stackpole Electronics Inc", Operating Temperature="-55°C ~ 155°C", Power (Watts)="0.1W, 1/10W", Ratings=AEC-Q200, Supplier Device Package=0603, Supplier Part Number 1=RNCF0603DTE1K00CT-ND, Temperature Coefficient=±25ppm/°C, Tolerance=±0.5%, ComponentLink1Description=Datasheet, ComponentLink1URL=https://www.seielect.com/catalog/sei-rncf.pdf, ComponentLink2Description="DigiKey Link", ComponentLink2URL=http://digikey.com/product-detail/en/stackpole-electronics-inc/RNCF0603DTE1K00/RNCF0603DTE1K00CT-ND/9915086, Composition="Thin Film", Features="Automotive AEC-Q200", Height - Seated (Max)="0.022\" (0.55mm)", LastUpdated="21-Jan-20 12:14:28 AM", Lifecycle Status=Active, Minimum Order=1, Number of Terminations=2, Package / Case="0603 (1608 Metric)", Packaging=TapeAndReel, Part Number=RNCF0603DTE1K00, Part Status=Active, PartId=26300, Price=0.05, Resistance="1 kOhms", Series=RNCF, Size / Dimension="0.061\" L x 0.031\" W (1.55mm x 0.80mm)", Supplier 1=DigiKey
R2: library part RT0603DRD0740K2L, "RES SMD 40.2KOHM 0.5% 1/10W 0603", Device Package="0603 (1608 Metric)", Manufacturer=Yageo, Operating Temperature="-55°C ~ 155°C", Power (Watts)="0.1W, 1/10W", Resistance="40.2 kOhms", Supplier Device Package=0603, Supplier Part Number 1=311-40.2KDCT-ND, Temperature Coefficient=±25ppm/°C, Tolerance=±0.5%, ComponentLink1Description=Datasheet, ComponentLink1URL=https://www.yageo.com/upload/media/product/productsearch/datasheet/rchip/PYu-RT_1-to-0.01_RoHS_L_11.pdf, ComponentLink2Description="DigiKey Link", ComponentLink2URL=http://digikey.com/product-detail/en/yageo/RT0603DRD0740K2L/311-40.2KDCT-ND/1035817, Composition="Thin Film", Height - Seated (Max)="0.022\" (0.55mm)", LastUpdated="13-Aug-20 10:36:48 AM", Lifecycle Status=Active, Minimum Order=1, Number of Terminations=2, Package / Case="0603 (1608 Metric)", Packaging=TapeAndReel, Part Number=RT0603DRD0740K2L, Part Status=Active, PartId=18076, Price=0.02, Series=RT, Size / Dimension="0.063\" L x 0.031\" W (1.60mm x 0.80mm)", Supplier 1=DigiKey
R3 R7_1 R7_2 R7_3 R7_4 R7_5 R11 R12 R14 R15 R17 R20: library part RNCS0603BKE10K0, "RES 10K OHM 0.1% 1/16W 0603", Device Package="0603 (1608 Metric)", Manufacturer="Stackpole Electronics Inc", Operating Temperature="-55°C ~ 155°C", Power (Watts)="0.063W, 1/16W", Ratings=AEC-Q200, Supplier Device Package=0603, Supplier Part Number 1=RNCS0603BKE10K0CT-ND, Temperature Coefficient=±25ppm/°C, Tolerance=±0.1%, ComponentLink1Description=Datasheet, ComponentLink1URL=https://www.seielect.com/catalog/sei-rncs_rnch.pdf, ComponentLink2Description="DigiKey Link", ComponentLink2URL=http://digikey.com/product-detail/en/stackpole-electronics-inc/RNCS0603BKE10K0/RNCS0603BKE10K0CT-ND/1800113, Composition="Thin Film", Features="Anti-Corrosive, Automotive AEC-Q200, Moisture Resistant", Height - Seated (Max)="0.022\" (0.55mm)", LastUpdated="21-Jan-20 12:25:01 AM", Lifecycle Status=Active, Minimum Order=1, Number of Terminations=2, Package / Case="0603 (1608 Metric)", Packaging=TapeAndReel, Part Number=RNCS0603BKE10K0, Part Status=Active, PartId=4838, Price=0.08, Resistance="10 kOhms", Series=RNCS, Size / Dimension="0.061\" L x 0.031\" W (1.55mm x 0.80mm)", Supplier 1=DigiKey
R4: library part CR0603-JW-753ELF, "RES SMD 75K OHM 5% 1/10W 0603", Device Package="0603 (1608 Metric)", Manufacturer="Bourns Inc.", Operating Temperature="-55°C ~ 155°C", Power (Watts)="0.1W, 1/10W", Supplier Device Package=0603, Supplier Part Number 1=CR0603-JW-753ELFCT-ND, Temperature Coefficient=±200ppm/°C, Tolerance=±5%, ComponentLink1Description=Datasheet, ComponentLink1URL=https://www.bourns.com/docs/Product-Datasheets/CHPREZTR.pdf, ComponentLink2Description="DigiKey Link", ComponentLink2URL=http://digikey.com/product-detail/en/bourns-inc/CR0603-JW-753ELF/CR0603-JW-753ELFCT-ND/4247893, Composition="Thick Film", Features="Moisture Resistant", Height - Seated (Max)="0.022\" (0.55mm)", LastUpdated="13-Aug-20 10:36:37 AM", Lifecycle Status=Active, Minimum Order=1, Number of Terminations=2, Package / Case="0603 (1608 Metric)", Packaging=CutTape, Part Number=CR0603-JW-753ELF, Part Status=Active, PartId=23428, Price=0.10, Resistance="75 kOhms", Series=CR0603, Size / Dimension="0.063\" L x 0.031\" W (1.60mm x 0.80mm)", Supplier 1=DigiKey
R6: library part RG1608P-133-B-T5, "RES SMD 13K OHM 0.1% 1/10W 0603", Device Package="0603 (1608 Metric)", Manufacturer=Susumu, Operating Temperature="-55°C ~ 155°C", Power (Watts)="0.1W, 1/10W", Ratings=AEC-Q200, Supplier Device Package=0603, Supplier Part Number 1=RG16P13.0KBCT-ND, Temperature Coefficient=±25ppm/°C, Tolerance=±0.1%, ComponentLink1Description=Datasheet, ComponentLink1URL=//media.digikey.com/pdf/Data%20Sheets/Susumu%20PDFs/RG_RM_RGH_Oct2012.pdf, ComponentLink2Description="DigiKey Link", ComponentLink2URL=http://digikey.com/product-detail/en/susumu/RG1608P-133-B-T5/RG16P13.0KBCT-ND/1240863, Composition="Thin Film", Features="Anti-Sulfur, Automotive AEC-Q200", Height - Seated (Max)="0.020\" (0.50mm)", LastUpdated="13-Aug-20 10:37:00 AM", Lifecycle Status=Active, Minimum Order=1, Number of Terminations=2, Package / Case="0603 (1608 Metric)", Packaging=TapeAndReel, Part Number=RG1608P-133-B-T5, Part Status=Active, PartId=12110, Price=0.06, Resistance="13 kOhms", Series=RG, Size / Dimension="0.063\" L x 0.031\" W (1.60mm x 0.80mm)", Supplier 1=DigiKey
R8_1 R8_2 R8_3 R8_4 R8_5 R9_1 R9_2 R9_3 R9_4 R9_5: library part CRCW06032R55FKEA, "RES SMD 2.55 OHM 1% 1/10W 0603", Device Package="0603 (1608 Metric)", Manufacturer="Vishay Dale", Operating Temperature="-55°C ~ 155°C", Power (Watts)="0.1W, 1/10W", Ratings=AEC-Q200, Supplier Device Package=0603, Supplier Part Number 1=541-2.55HHCT-ND, Temperature Coefficient=±100ppm/°C, Tolerance=±1%, ComponentLink1Description=Datasheet, ComponentLink1URL=http://www.vishay.com/docs/20035/dcrcwe3.pdf, ComponentLink2Description="DigiKey Link", ComponentLink2URL=http://digikey.com/product-detail/en/vishay-dale/CRCW06032R55FKEA/541-2.55HHCT-ND/1962041, Composition="Thick Film", Features="Automotive AEC-Q200", Height - Seated (Max)="0.020\" (0.50mm)", LastUpdated="21-Jan-20 12:16:55 AM", Lifecycle Status=Active, Minimum Order=1, Number of Terminations=2, Package / Case="0603 (1608 Metric)", Packaging=CutTape, Part Number=CRCW06032R55FKEA, Part Status=Active, PartId=23466, Price=0.10, Resistance="2.55 Ohms", Series=CRCW, Size / Dimension="0.061\" L x 0.033\" W (1.55mm x 0.85mm)", Supplier 1=DigiKey
R10: library part LVT06R0030GER, "RES 0.003 OHM 2% 1/3W 0603", Device Package="0603 (1608 Metric)", Manufacturer=Ohmite, Operating Temperature="-55°C ~ 155°C", Power (Watts)="0.333W, 1/3W", Supplier Device Package=0603, Supplier Part Number 1=LVT06R0030GERCT-ND, Temperature Coefficient=±150ppm/°C, Tolerance=±2%, ComponentLink1Description=Datasheet, ComponentLink1URL=https://www.ohmite.com/assets/docs/res_lvt.pdf?r=false, ComponentLink2Description="DigiKey Link", ComponentLink2URL=http://digikey.com/product-detail/en/ohmite/LVT06R0030GER/LVT06R0030GERCT-ND/9556168, Composition="Metal Element", Features="Current Sense", Height - Seated (Max)="0.026\" (0.65mm)", LastUpdated="9/2/2020 1:17:40 AM", Lifecycle Status=Active, Minimum Order=1, Number of Terminations=2, Package / Case="0603 (1608 Metric)", Packaging=TapeAndReel, Part Number=LVT06R0030GER, Part Status=Active, PartId=540, Price=0.13, Resistance="3 mOhms", Series=LVT, Size / Dimension="0.063\" L x 0.031\" W (1.60mm x 0.80mm)", Supplier 1=DigiKey
R13: library part RC0603FR-076K49L, "RES SMD 6.49K OHM 1% 1/10W 0603", Device Package="0603 (1608 Metric)", Manufacturer=Yageo, Operating Temperature="-55°C ~ 155°C", Power (Watts)="0.1W, 1/10W", Supplier Device Package=0603, Supplier Part Number 1=311-6.49KHRCT-ND, Temperature Coefficient=±100ppm/°C, Tolerance=±1%, ComponentLink1Description=Datasheet, ComponentLink1URL=https://www.yageo.com/upload/media/product/productsearch/datasheet/rchip/PYu-RC_Group_51_RoHS_L_10.pdf, ComponentLink2Description="DigiKey Link", ComponentLink2URL=http://digikey.com/product-detail/en/yageo/RC0603FR-076K49L/311-6.49KHRCT-ND/730268, Composition="Thick Film", Features="Moisture Resistant", Height - Seated (Max)="0.022\" (0.55mm)", LastUpdated="21-Jan-20 12:22:01 AM", Lifecycle Status=Active, Minimum Order=1, Number of Terminations=2, Package / Case="0603 (1608 Metric)", Packaging=CutTape, Part Number=RC0603FR-076K49L, Part Status=Active, PartId=12285, Price=0.10, Resistance="6.49 kOhms", Series=RC, Size / Dimension="0.063\" L x 0.031\" W (1.60mm x 0.80mm)", Supplier 1=DigiKey
SW: "50 mA SPST Round Actuator 160 Gram Force Tactile Pushbutton Switch", Contact_Current_Rating="50 mA", Package=None, Availability=Unavailable, Configuration_Pole-Throw="Single Pole - Single Throw", EU_RoHS_Compliance=Compliant, MF="TE Connectivity", MP=1825910-2, Price=None, SnapEDA_Link=https://www.snapeda.com/parts/1825910-2/TE%20Connectivity%20ALCOSWITCH%20Switches/view-part/278983/?ref=snap, TE_purchase_URL=https://www.te.com/usa-en/product-1825910-2.html?te_bu=Cor&te_type=disp&te_campaign=seda_glo_cor-seda-global-disp-prtnr-fy19-seda-model-bom-cta_sma-317_1&elqCampaignId=32493
TP1: "Test point"
U1: "ADJ step down Buck"
U2_1 U2_2 U2_3 U2_4 U2_5: library part UCC27282DRCR, "3-A, 120-V half bridge gate driver with 5-V UVLO, interlock and enable 10-VSON -40 to 125", Package="VSON-10 Texas Instruments", Availability=Warning, DigiKey-Purchase-URL=https://snapeda.com/shop?store=DigiKey&id=3625400, MF="Texas Instruments", MP=UCC27282DRCR, Price=None, SnapEDA_Link=https://www.snapeda.com/parts/UCC27282DRCR/Texas%20Instruments/view-part/3625400/?ref=snap, Texas_Instruments-Purchase-URL=https://snapeda.com/shop?store=Texas+Instruments&id=3625400
U3: "Current sense amplifier"
U4: "PIC32MK Microcontroller IC 32-Bit 120MHz 1MB _1M x 8_ FLASH 64-TQFP _10x10_", Package="TQFP-64 Microchip", Digi-Key_Part_Number=PIC32MK1024MCF064-I/PT-ND, Digi-Key_Purchase_URL=https://www.digikey.kr/product-detail/en/microchip-technology/PIC32MK1024MCF064-I-PT/PIC32MK1024MCF064-I-PT-ND/7164902?utm_source=snapeda&utm_medium=aggregator&utm_campaign=symbol, MF=Microchip, MP=PIC32MK1024MCF064-I/PT, SnapEDA_Link=https://www.snapeda.com/parts/PIC32MK1024MCF064-I/PT/Microchip/view-part/876704/?ref=snap

## Free pads (board coordinates)
  round 0 hole 3 unplated: 1(-26,-26) 1(-26,26) 1(-6.718,-6.718) 1(-5.657,5.657) 1(5.657,-5.657) 1(6.717,6.717) 1(26,-26) 1(26,26)
  round 0 hole 8 unplated: 1(0,0)

## Via types
v1: diameter 0.7, hole 0.35, Top Layer to Bottom Layer, tented both sides, 219 vias
v2: diameter 1.8, hole 1, Top Layer to Bottom Layer, tented top, 3 vias
v3: diameter 2, hole 1, Top Layer to Bottom Layer, tented top, 2 vias

## Nets (pads, with @x,y where several pads share a name; then routed paths per layer and width w, separated by ;. In a path a pad name is that pad's centre, name@x,y a point inside that pad or via, vN(x,y) a via of type N, cw(c..) or ccw(c..) an arc to the next point about the centre after c; other vN are vias at no path point)
1V65: C25.2 IC1.5 R13.2 U3.1 | length 16.9
  Top Layer w0.254: U3.1@21.06,19.909 21.221,20.07 21.34,20.07 21.501,19.909 23.891,19.909 28.253,15.547 C25.2@28.253,12.084 ; 27.703,11.584 28.203,12.084 C25.2@28.253,12.084 ; R13.2@30.303,14.134 30.303,14.084 29.953,13.734 IC1.5@29.953,12.734 28.953,12.734 28.303,12.084 C25.2@28.253,12.084
3V3: C2.2 C3.2 C4.2 C10.1 C16.1 C18.1 C19.1 C20.1 C21.1 C22.1 C23.1 C24.1 C27.2 IC1.1 J4.4 L1.2 P3.2 P8.1 R1.1 R2.2 R11.2 R12.2 R15.2 R17.1 R20.2 U3.3 U4.10 U4.19 U4.26 U4.35 U4.38 U4.57 U5.2 | length 233.9